# EAGLE board walter (EAGLE 9.6.2)
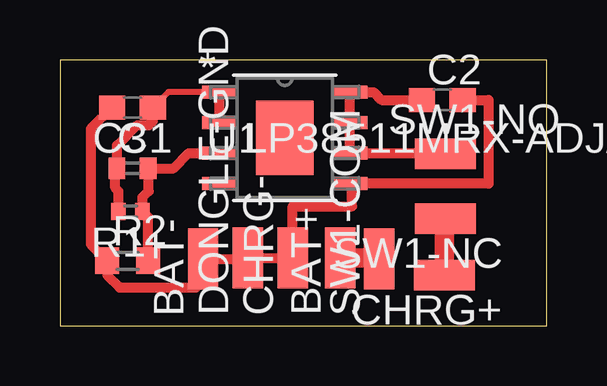
[diagram p0: board, top side]

Size 20.3 x 11.1 mm. Coordinates in mm from the lower left corner, seen from the top.
Outline: 0,0 20.3,0 20.3,11.1 0,11.1 0,0
Copper layers (1*16): Top 0.035mm / dielectric 1.5mm / Bottom 0.035mm
Design rules "default": minimum track width 6mil, minimum drill 0.35mm, track to track 6mil, track to pad 6mil, pad to pad 6mil, via to via 6mil, smd to smd 6mil, copper to edge 40mil, drill to drill 6mil, minimum pad ring 10mil, minimum via ring 8mil, stop-mask expansion 4mil, vias tented up to drill 0mil, thermal gap 10mil

## Footprints (pad centres in the part's own frame; a part is rotated, then mirrored left to right if it is on the bottom)
SMD1,27-2,54 = smd 1.27 x 2.54: 1 0,0
C0402 = smd 0.7 x 0.9: 1 -0.65,0; 2 0.65,0
C0603 = smd 1.1 x 1: 1 -0.85,0; 2 0.85,0
R0402 = smd 0.6 x 0.7: 1 -0.5,0; 2 0.5,0
R0603 = smd 1 x 1.1: 1 -0.85,0; 2 0.85,0
MRA08B_TEX = smd 1.46 x 0.533: 1 -2.724,1.905; 2 -2.724,0.635; 3 -2.724,-0.635; 4 -2.724,-1.905; 5 2.724,-1.905; 6 2.724,-0.635; 7 2.724,0.635; 8 2.724,1.905 | smd 2.413 x 3.099: 9 0,0

## Placement (x,y rotation side)
BAT+  [SMD1,27-2,54]  11.69,2.85 0 top
BAT-  [SMD1,27-2,54]  5.97,2.8 0 top
C1  2700pF  [C0402]  3.03,6.58 0 top
C2  10uF  [C0603]  15.94,9.43 0 top
C3  10uF  [C0603]  3.03,9.12 180 top
CHRG+  [SMD1,27-2,54]  16.03,2.11 90 top
CHRG-  [SMD1,27-2,54]  9.7,2.85 0 top
DONGLE-GND  [SMD1,27-2,54]  7.83,2.85 0 top
R1  2K  [R0402]  2.94,4.78 180 top
R2  357  [R0603]  2.83,2.72 0 top
SW1-COM  [SMD1,27-2,54]  13.32,2.8 0 top
SW1-NC  [SMD1,27-2,54]  16.08,4.48 90 top
SW1-NO  [SMD1,27-2,54]  16.08,7.19 270 top
U1  LP38511MRX-ADJ/NOPB  [MRA08B_TEX]  9.38,7.85 0 top

## Library data of the parts
BAT+ BAT- CHRG+ CHRG- DONGLE-GND SW1-COM SW1-NC SW1-NO = wirepad
C1-C3 = rcl; SPICEPREFIX: C
R1 R2 = rcl; SPICEPREFIX: R
U1 = LP38511MRX-ADJ:NOPB; BUILT_BY: EMA_UL_Team; MANUFACTURER_PART_NUMBER: LP38511MRX-ADJ/NOPB; SOURCELIBRARY: National_2014-06-20; VENDOR: Texas Instruments

## Nets
GND: BAT-.1 C2.2 C3.2 CHRG-.1 DONGLE-GND.1 R2.1 U1.5
N$1: C2.1 SW1-NO.1 U1.6 U1.7 U1.8
N$3: C1.1 C3.1 R1.2 U1.1 U1.2
N$4: C1.2 R1.1 R2.2 U1.3
N$5: BAT+.1 SW1-COM.1
N$7: CHRG+.1 SW1-NC.1

## Tracks (layer width: path | path; a pad name or v marks a point on that pad's centre or on a via)
GND
  Top 0.406: CHRG-.1 DONGLE-GND.1 7.83,2.8 BAT-.1 5.97,1.9 5.67,1.6 2.48,1.6 1.98,2.11 R2.1 1.29,3.41 1.29,8.23 C3.2 | CHRG-.1 | CHRG-.1 9.7,4.99 12.18,4.99 12.18,5.94 U1.5 17.87,5.94 17.87,9.43 C2.2
N$1
  Top 0.406: SW1-NO.1 16.06,7.21 U1.6 U1.7 U1.8 13.09,9.75 13.42,9.43 C2.1
N$3
  Top 0.254: C3.1 4.53,9.77 6.63,9.77 U1.1
  Top 0.406: R1.2 2.44,5.62 2.3,5.76 2.3,6.5 C1.1 2.38,7.53 3.22,8.38 3.7,8.38 3.88,8.55 C3.1 | U1.2 U1.1
N$4
  Top 0.406: U1.3 5.37,7.21 4.74,6.58 C1.2 3.7,6.55 3.7,5.63 3.44,5.37 R1.1 3.67,4.55 R2.2
N$5
  Top 0.813: BAT+.1 13.27,2.85 SW1-COM.1
N$7
  Top 0.813: CHRG+.1 16.03,4.43 SW1-NC.1